# Altium PCB FAT42m2.PcbDoc
Units mm, origin at the board's own origin, x right, y up, seen from the top; angles counter-clockwise.
Board outline 152.4 x 101.6 mm, 2 copper layers (Top Layer, Bottom Layer); 64 components, 142 nets, 215 pads, 78 vias.
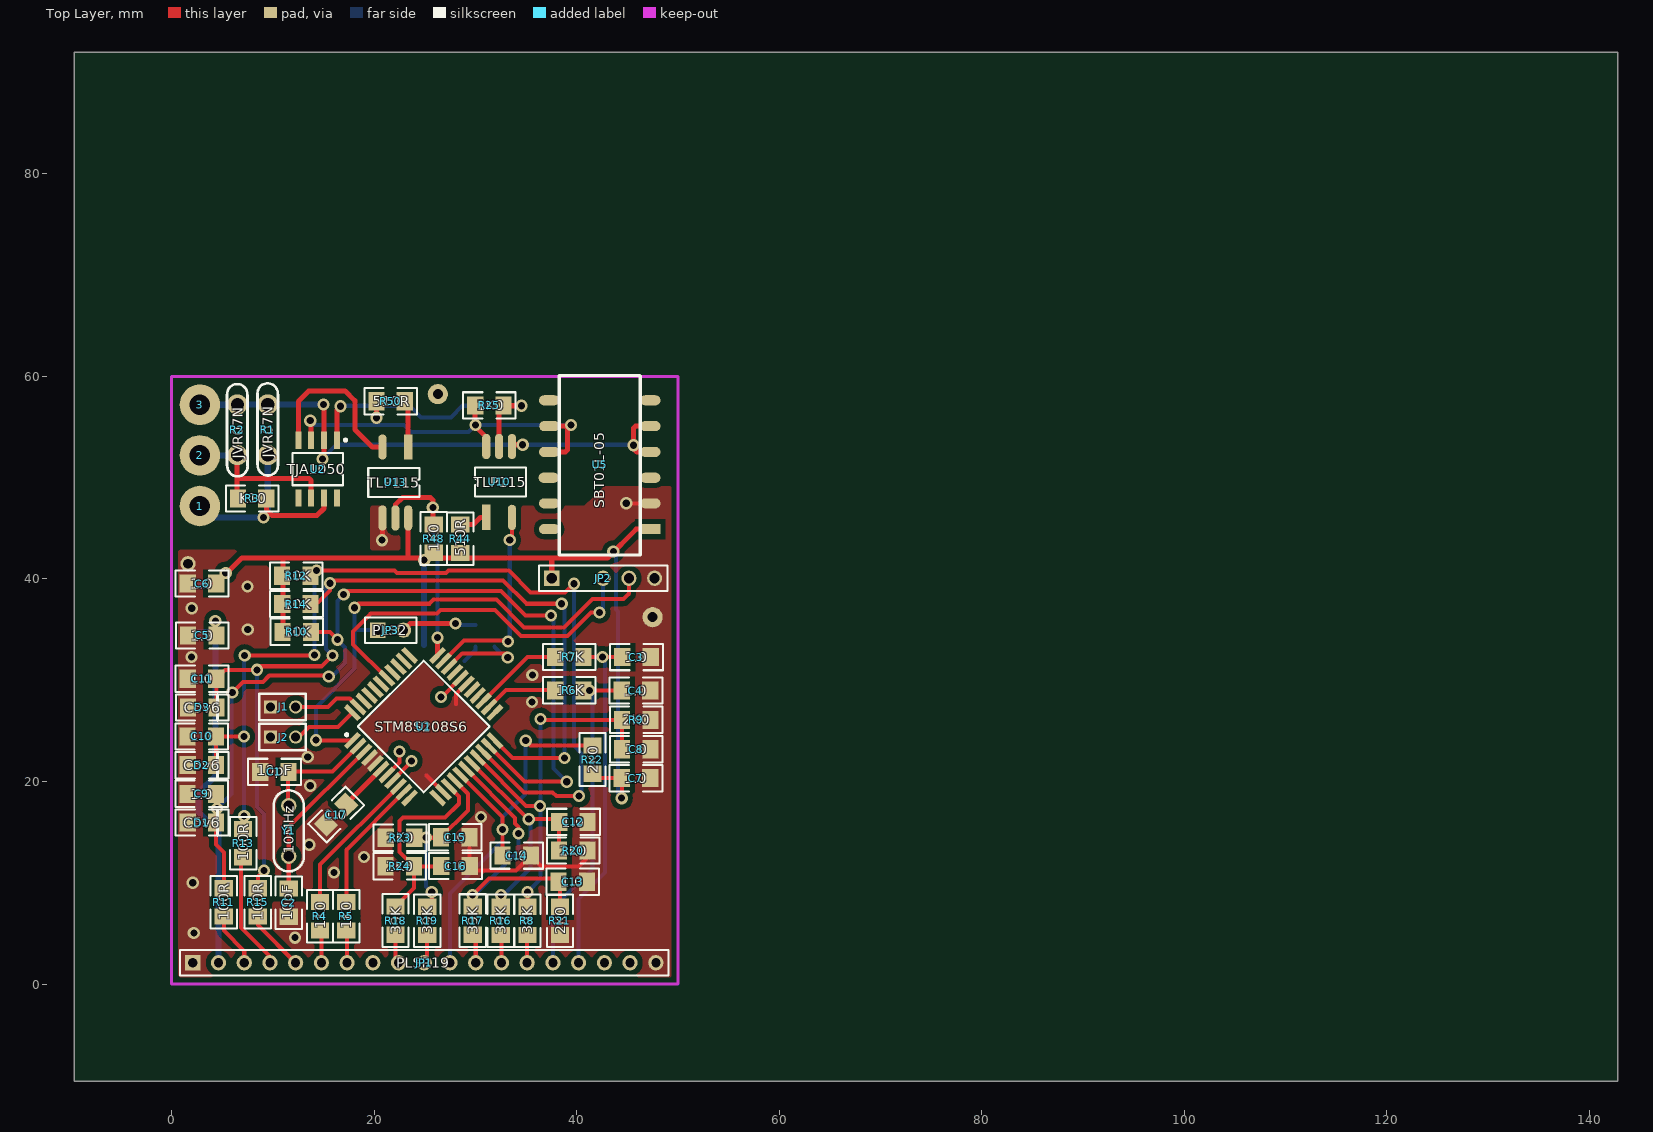
[diagram p0: Top Layer view]
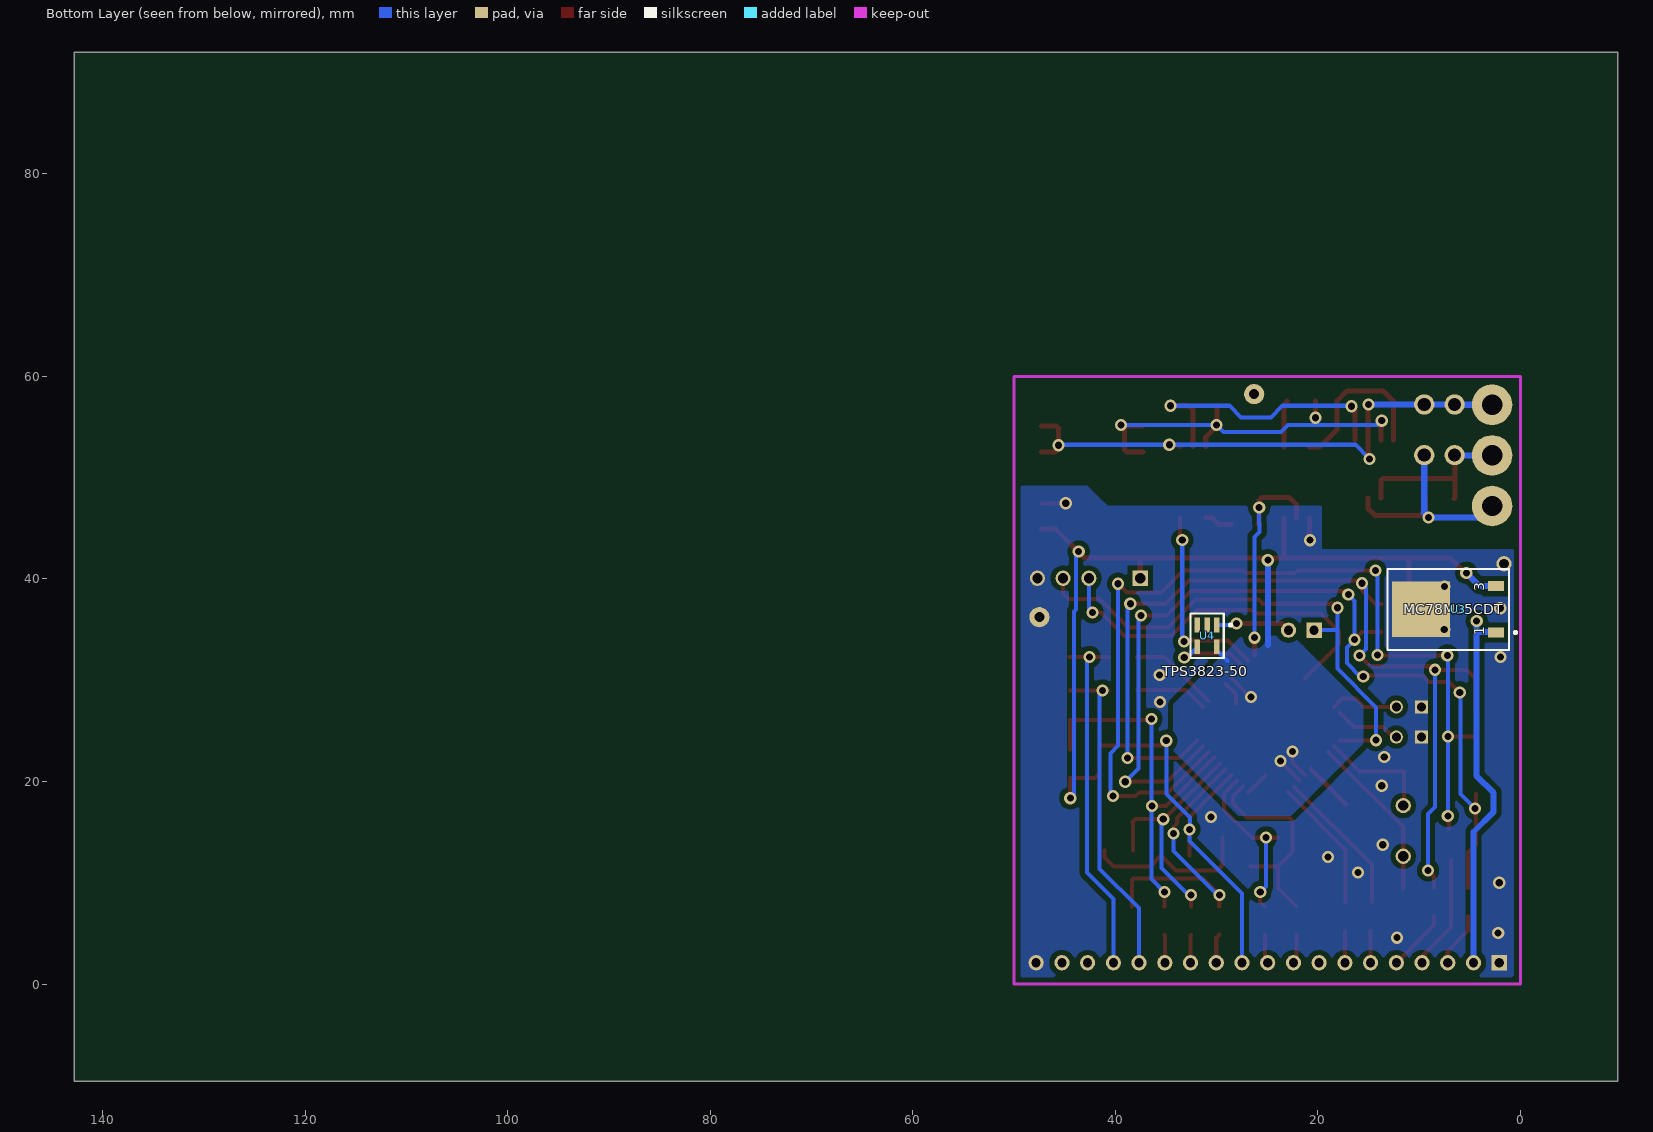
[diagram p1: Bottom Layer view, seen from below]

## Layer stack, top to bottom
Top Layer: signal copper 0.0356
Dielectric: dielectric 0.32, FR-4, Dk 4.8
Bottom Layer: signal copper 0.0356

## Board outline
-9.6,-9.6 142.8,-9.6 142.8,92 -9.6,92

## Design rules (kind name [scope] priority, off if disabled: settings)
Clearance POLY [InPoly] p1: gap=0.5
Clearance mega [InComponent(U1)] p2: gap=0.2
Clearance [All] p3: gap=0.3
ComponentClearance [All] p1: gap=0.01 collisioncheckmode=0
PolygonConnect [All] p1: connectstyle=Direct reliefconductorwidth=0.5 reliefentries=4 polygonreliefangle="90 Angle"
RoutingLayers [All] p1: top layer=Horizontal bottom layer=Vertical
RoutingVias [All] p1: holewidth=0.7 width=1.2 viastyle="Through Hole" minholewidth=0.6 minwidth=1.1 maxholewidth=0.85 maxwidth=1.5
SolderMaskExpansion [All] p1: expansion=0.102
TestPointUsage [All] p1: valid=0 allowmultiple=FALSE
Testpoint [All] p1: side=15 testpointundercomponent=TRUE minsize=1.016 maxsize=2.54 preferedsize=1.524 minholesize=0 maxholesize=1.016 preferedholesize=0.813 testpointgrid=0.025 style=1023 order=1234567890
Width [All] p1: maxlimit=2 minlimit=0.254 preferedwidth=0.254 toplayer_prefwidth=0.4 bottomlayer_prefwidth=0.4 minimp=50.000000 maximp=50.000000 favimp=50.000000
16 further rules are at their usual default settings.

## Components (designator, comment, footprint, x,y, rotation, side; value= is the part's Value field where it differs from the comment)
1 "" PIN2R#1 2.875,46.85 r0 top (schematic designator ?)
2 "" PIN2R#2 2.875,52.05 r0 top (schematic designator ?)
3 "" PIN2R#3 2.7,56.925 r0 top (schematic designator ?)
C1 "10pF" _1206#1 10.175,20.95 r0 top (schematic designator C?)
C2 "10pF" _1206#1 11.575,8.05 r90 top (schematic designator C?)
C3 "1.0" _1206#1 45.9,32.275 r180 top (schematic designator C?)
C4 "1.0" _1206#1 45.85,28.975 r180 top (schematic designator C?)
C5 "1.0" _1206#1 3.05,34.425 r0 top
C6 "1.0" _1206#1 3.025,39.55 r0 top
C7 "1.0" _1206#1 45.85,20.325 r180 top
C8 "1.0" _1206#1 45.875,23.175 r180 top (schematic designator C?)
C9 "1.0" _1206#1 3,18.782 r0 top
C10 "1.0" _1206#1 3,24.452 r0 top
C11 "1.0" _1206#1 3.025,30.147 r0 top
C12 "1.0" _1206#1 39.675,16 r180 top
C13 "1.0" _1206#1 39.6,10.1 r180 top
C14 "1.0" _1206#1 34.075,12.675 r180 top
C15 "1.0" _1206#1 28,14.475 r180 top
C16 "1.0" _1206#2 28.05,11.65 r180 top
C17 "1.0" _1206#2 16.25,16.725 r45 top
D1 "C5v6" _1206d 3,15.935 r180 top
D2 "C5v6" _1206d 3,21.605 r180 top
D3 "C5v6" _1206d 3.025,27.3 r180 top
J1 "" jmp 9.75,27.375 r0 top
J2 "" jmp 9.75,24.4 r0 top
JP1 "PLSR19" HDR1X19 2.1,2.1 r0 top
JP2 "" HDR1X5_uart 37.55,40.075 r0 top
JP3 "PLS2" HDR1X2 20.375,34.925 r0 top
R1 "JVR07N" JVR07N 9.5,52.225 r90 top
R2 "JVR07N" JVR07N 6.5,57.225 r270 top
R3 "K10" _1206#1 7.975,47.95 r0 top
R4 "1K0" _1206#1 14.65,6.7 r90 top (schematic designator R31)
R5 "1K0" _1206#1 17.25,6.7 r90 top (schematic designator R30)
R6 "10K" _1206#1 39.3,29 r0 top (schematic designator R?)
R7 "10K" _1206#1 39.3,32.3 r0 top (schematic designator R?)
R8 "39K" _1206#1 35.15,6.225 r270 top (schematic designator R?)
R9 "2K0" _1206#1 45.875,26.075 r180 top (schematic designator R?)
R10 "10K" _1206#1 12.375,34.775 r0 top
R11 "100R" _1206#1 5.175,8.05 r270 top
R12 "10K" _1206#1 12.325,40.325 r0 top
R13 "100R" _1206#1 7.075,13.9 r270 top
R14 "10K" _1206#1 12.35,37.525 r0 top
R15 "100R" _1206#1 8.525,8.05 r270 top
R16 "39K" _1206#1 32.525,6.225 r270 top
R17 "39K" _1206#1 29.75,6.25 r270 top
R18 "39K" _1206#2 22.125,6.275 r270 top
R19 "39K" _1206#1 25.25,6.225 r270 top
R20 "2K0" _1206#1 39.65,13.175 r180 top
R21 "2K0" _1206#1 38.35,6.25 r90 top
R22 "2K0" _1206#1 41.575,22.15 r270 top
R23 "2K0" _1206#1 22.575,14.45 r0 top
R24 "2K0" _1206#2 22.525,11.625 r0 top
R25 "1K0" _1206#1 31.375,57.125 r180 top (schematic designator R?)
R44 "510R" _1206#1 28.525,43.95 r270 top
R48 "1K0" _1206#1 25.9,43.975 r270 top
R50 "510R" _1206#1 21.65,57.55 r0 top
U1 "STM8S208S6" QFP10X10-G44/G10N 24.9,25.425 r45 top
U2 "TJA1050" SO-G8/D5 14.425,50.85 r180 top
U3 "MC78M05CDT" SIP-G3/Z11.05 6.125,37 r90 bottom
U4 "TPS3823-50" SO-G5/P.95 30.95,34.375 r0 bottom
U5 "SBT01L-05" SBT01DET01 47.293,44.907 r90 top
U10 "TLP115" tlp115 31.075,46.075 r90 top
U13 "TLP115" tlp115 23.375,53.025 r270 top
Y1 "10MHz" QWARZ1 11.575,17.625 r270 top

## Footprints (in the part's own frame and the unit in brackets; to place one, negate y for a bottom-side part, rotate by r counter-clockwise, add the part's x,y. Pads: shape width x height; smd on the part's side, far side on the other; paste and mask are expansions set on the pad)
_1206#1 [mm]
  rect 1.6x1.8 smd: 1(-1.412,-0.007) 2(1.388,-0.007)
  silkscreen extent -2.61,-1.31 2.59,1.29
_1206#2 [mm]
  rect 1.6x1.8 smd: 1(-1.393,-0.003) 2(1.407,-0.003)
  silkscreen extent -2.59,-1.3 2.61,1.3
_1206d [mm]
  rect 1.6x1.8 smd: 1(1.395,-0.009) 2(-1.405,-0.009)
  silkscreen extent -2.6,-1.31 2.6,1.29
HDR1X2 [mm]
  rect 1.5x1.5 hole 0.9: 1(-0.005,0.012)
  round 1.5 hole 0.9: 2(2.535,0.012)
  silkscreen extent -1.28,-1.26 3.8,1.28
HDR1X5_uart [mm]
  rect 1.5x1.5 hole 1: 1(-0.008,-0.009)
  round 1.5 hole 1: 3(5.072,-0.009) 4(7.612,-0.009) 5(10.152,-0.009)
  silkscreen extent -1.28,-1.28 11.42,1.26
HDR1X19 [mm]
  rect 1.5x1.5 hole 0.9: 1(0,0)
  round 1.5 hole 0.9: 2(2.54,0) 3(5.08,0) 4(7.62,0) 5(10.16,0) 6(12.7,0) 7(15.24,0) 8(17.78,0) 9(20.32,0) 10(22.86,0) 11(25.4,0) 12(27.94,0) 13(30.48,0) 14(33.02,0) 15(35.56,0) 16(38.1,0) 17(40.64,0) 18(43.18,0) 19(45.72,0)
  silkscreen extent -1.27,-1.27 46.99,1.27
jmp [mm]
  rect 1.3x1.3 hole 0.9: 1(0.008,-0.012)
  round 1.3 hole 0.9: 2(2.508,-0.012)
  silkscreen extent -1.09,-1.31 3.51,1.29
JVR07N [mm]
  round 2 hole 1.3: 1(0,0) 2(5,0)
  silkscreen extent -2.01,-1.02 7.09,1.02
PIN2R#1 [mm]
  round 4 hole 2: 1(-0.075,0.35)
PIN2R#2 [mm]
  round 4 hole 2: 1(-0.075,0.15)
PIN2R#3 [mm]
  round 4 hole 2: 1(0.1,0.275)
QFP10X10-G44/G10N [mm]
  rect 1.9x0.5 smd: 1(-5.95,4) 2(-5.95,3.2) 3(-5.95,2.4) 4(-5.95,1.6) 5(-5.95,0.8) 6(-5.95,0) 7(-5.95,-0.8) 8(-5.95,-1.6) 9(-5.95,-2.4) 10(-5.95,-3.2) 11(-5.95,-4) 23(5.95,-4) 24(5.95,-3.2) 25(5.95,-2.4) 26(5.95,-1.6) 27(5.95,-0.8) 28(5.95,0) 29(5.95,0.8) 30(5.95,1.6) 31(5.95,2.4) 32(5.95,3.2) 33(5.95,4)
  rect 0.5x1.9 smd: 12(-4,-5.95) 13(-3.2,-5.95) 14(-2.4,-5.95) 15(-1.6,-5.95) 16(-0.8,-5.95) 17(0,-5.95) 18(0.8,-5.95) 19(1.6,-5.95) 20(2.4,-5.95) 21(3.2,-5.95) 22(4,-5.95) 34(4,5.95) 35(3.2,5.95) 36(2.4,5.95) 37(1.6,5.95) 38(0.8,5.95) 39(0,5.95) 40(-0.8,5.95) 41(-1.6,5.95) 42(-2.4,5.95) 43(-3.2,5.95) 44(-4,5.95)
  silkscreen extent -6.07,-4.6 4.6,4.92
QWARZ1 [mm]
  round 1.5 hole 1: 1(0.008,0) 2(5.008,0)
  silkscreen extent -1.49,-1.5 6.51,1.5
SBT01DET01 [mm]
  rect 1x2 smd: 1(0.007,0.007)
  oval 1x2 smd: 2(2.557,0.007) 3(5.082,0.007) 4(7.632,0.007) 4(10.182,0.007) 5(7.632,10.007) 5(10.182,9.982) 6(5.082,10.057) 7(2.557,10.007) 8(0.007,10.007) 10(12.732,0.007) 11(12.732,10.007)
  silkscreen extent -2.54,1.01 15.16,9.01
SIP-G3/Z11.05 [mm]
  rect 1x1.6 smd: 1(-2.285,-3.7) 3(2.285,-3.7)
  rect 5.5x5.7 smd: 4(0,3.7)
  silkscreen extent -4,-5.75 4,7.03
SO-G5/P.95 [mm]
  rect 0.55x1.45 smd: 1(-0.95,-1.075) 2(0,-1.075) 3(0.95,-1.075) 4(0.95,1.075) 5(-0.95,1.075)
  silkscreen extent -2.42,-2.2 1.65,2.2
SO-G8/D5 [mm]
  rect 0.6x1.7 smd: 1(-1.905,-2.85) 2(-0.635,-2.85) 3(0.635,-2.85) 4(1.905,-2.85) 5(1.905,2.85) 6(0.635,2.85) 7(-0.635,2.85) 8(-1.905,2.85)
  silkscreen extent -2.88,-2.97 2.5,1.6
tlp115 [mm]
  rect 2.5x0.8 smd: 1(0.001,-0.004)
  oval 2.5x0.8 smd: 3(0.001,-2.544) 4(7.001,-2.544) 5(7.001,-1.274) 6(7.001,-0.004)
  silkscreen extent 2.09,-3.95 4.92,1.13

## Part data
1 2 3: library part Socket_Ring, "Socket"
C1 C2 C3 C4 C5 C6 C7 C8 C9 C10 C11 C12 C13 C14 C15 C16 C17: library part "Cap Semi", "Capacitor (Semiconductor SIM Model)"
D1 D2 D3: library part Zener, "Default Diode"
J1 J2: library part JMP, "Switch"
JP1: library part "Header 30", "Header, 30-Pin"
JP2: library part SWIM_CONN
JP3: library part "Header 2", "Header, 2-Pin"
R1 R2: library part "Res Varistor", "Varistor (Voltage-Sensitive Resistor)"
R3 R4 R5 R6 R7 R8 R9 R10 R11 R12 R13 R14 R15 R16 R17 R18 R19 R20 R21 R22 R23 R24 R25 R44 R48 R50: library part Res2, "Resistor"
U3: "Three-Terminal Medium Current Positive Voltage Regulator"
U4: library part TPS3823, "Reset IC"
U5: library part SBT01L
Y1: library part XTAL, "Crystal Oscillator"

## Free pads (board coordinates)
  round 1.5 hole 0.95: 0(1.625,41.5)
  round 2 hole 1: 0(26.3,58.25) 1(47.5,36.225)

## Via types
v1: diameter 1.2, hole 0.7, Top Layer to Bottom Layer, 78 vias

## Nets (pads, with @x,y where several pads share a name; then routed paths per layer and width w, separated by ;. In a path a pad name is that pad's centre, name@x,y a point inside that pad or via, vN(x,y) a via of type N, cw(c..) or ccw(c..) an arc to the next point about the centre after c; other vN are vias at no path point)
+5V: C6.2 C7.2 JP2.1 R10.1 R12.1 R14.1 R22.2 R44.2 R48.2 U1.7 U1.8 U1.29 U3.3 U4.5 U5.1 U13.6 | length 110.3
  Top Layer w0.4: U1.7 22.5,21.894 v1(22.5,22.975) ; U1.8 23.7,21.962 v1(23.7,22.025) ; v1(26.6,28.35) 26.694,28.35 U1.29 ; R22.2 41.999,20.332 C7.2 44.462,18.362 v1(44.45,18.35)
  Top Layer w0.5: C6.2 6.944,42.075 43.05,42.075 45.89,44.915 U5.1 ; R10.1 11,34.806 11,42.075 ; 23.35,42.075 23.371,42.096 U13.6 ; v1(24.95,41.85) v1@24.95,42.075 ; 37.525,42.075 37.542,42.058 JP2.1 ; U5.1@47.285,44.907 U5.1@47.293,44.907
  Bottom Layer w0.4: 28.925,31.9 30,32.975 U4.5 ; v1(43.625,42.7) 43.9,42.425 43.9,36.975 44.1,36.775 44.1,18.7 v1(44.45,18.35)
  Bottom Layer w0.6: U3.3 4.035,39.285 v1(5.35,40.6) ; 24.95,33.5 v1(24.95,41.85)
+12V: 
AN0: 
AN1: 
AN2: 
AN3: 
BL0: 
BL1: 
C0: 
C1: 
C2: 
C3: 
C4: 
C5: 
C7: 
C8: 
CS: 
D2: 
D3: 
D4: 
D4: 
D4: 
D5: 
D6: 
D7: 
GND: C1.1 C2.1 C3.1 C4.1 C5.1 C6.1 C7.1 C8.1 C9.1 C10.1 C11.1 C12.1 C13.1 C14.1 C15.1 C16.1 C17.1 D1.1 D2.1 D3.1 J1.1 J2.1 JP1.1 JP1.19 JP2.5 pad.0@1.625,41.5 pad.1 R9.1 R20.1 R21.1 R23.1 R24.1 U1.4 U1.5 U1.13 U1.28 U3.4 U4.2 U5.2 U13.4 | length 26.1
  Top Layer w0.4: 25.175,20.6 26.82,18.955 U1.13 ; 28.1,27.65 28.1,28.625 U1.28 ; C15.1 29.412,11.738 29.95,11.2 34.006,11.2 C14.1 36.544,11.625 40.175,11.625 41.062,12.512 R20.1 ; v1(44.9,47.475) 44.91,47.465 U5.2
  Top Layer w0.5: v1(20.8,43.825) 20.831,43.856 U13.4
  other v1: 12.2,4.575 2.2,5.025 2.1,10 16.05,11 19,12.55 13.6,13.75 30.575,16.5 13.7,19.575 13.45,22.4 35.6,27.85 35.625,30.5 1.975,32.3 7.525,35 2,37.1 7.5,39.25
ID0: JP1.3 R11.2 | length 5.4
  Top Layer w0.4: R11.2 5.168,5.282 7.18,3.27 JP1.3
ID0: 
ID1: JP1.4 R13.2 | length 11.3
  Top Layer w0.4: R13.2@6.85,12.194 6.85,5.6 9.72,2.73 JP1.4
ID2: JP1.5 R15.2 | length 6.1
  Top Layer w0.4: R15.2 8.518,5.807 12.225,2.1 JP1.5
IN0: JP1.14 R8.2 | length 2.7
  Top Layer w0.4: JP1.14 35.12,4.814 R8.2
IN1: JP1.13 R16.2 | length 2.8
  Top Layer w0.4: R16.2 32.58,4.776 JP1.13
IN2: JP1.12 R17.2 | length 2.9
  Top Layer w0.4: R17.2 30.04,4.566 JP1.12
IN3: C14.2 JP1.11 R22.1 U1.16 | length 41.5
  Top Layer w0.4: U1.16 32.687,16.506 C14.2 ; v1(34.975,24.025) 35.438,23.562 R22.1
  Bottom Layer w0.4: JP1.11 27.5,8.925 32.687,14.112 v1(32.687,15.25) 32.63,15.307 32.63,16.43 33.225,17.025 34.975,18.775 v1(34.975,24.025)
IN4: JP1.10 R19.2 | length 2.9
  Top Layer w0.4: JP1.10 25.243,2.383 R19.2
IN5: JP1.9 R18.2 | length 2.9
  Top Layer w0.4: R18.2 22.122,2.398 JP1.9
LED0: JP1.6 R4.1 | length 3.1
  Top Layer w0.4: JP1.6 14.8,5.2 R4.1@14.825,5.225
LED1: JP1.7 R5.1 | length 3.1
  Top Layer w0.4: JP1.7 R5.1@17.34,5.165
MISO: 
MOSI: 
Net1_1: 3.1 R1.2 R2.1 U2.2 U5.4 U10.4 | length 55.7
  Top Layer w0.5: v1(14.9,51.85) 15.06,52.01 15.06,57.165 v1(15,57.225) ; U10.4 33.793,53.25 v1(34.675,53.25) ; U5.4@47.293,52.532 45.968,52.532 45.625,52.875 45.625,54.875 45.832,55.082 U5.4@47.293,55.082
  Bottom Layer w0.4: v1(14.9,51.85) 16.3,53.25 45.575,53.25 v1(45.625,53.2)
  Bottom Layer w0.6: 3.1 6.475,57.2 R2.1 R1.2 14.975,57.225 14.987,57.238 15,57.25 v1(15,57.225)
Net2_1: 2.1 R2.2 R3.1 U2.6 | length 17.1
  Top Layer w0.5: 6.475,49.925 13.575,49.925 13.79,49.71 U2.6 ; R2.2@6.475,52.2 6.475,48.031 R3.1
  Bottom Layer w0.6: 2.1 6.475,52.2 R2.2
Net3_1: 1.1 R1.1 R3.2 U2.7 | length 22.1
  Top Layer w0.5: v1(9.075,46.075) 9.1,46.075 9.525,46.5 ; R3.2 9.363,46.837 9.925,46.275 14.375,46.275 15.06,46.96 U2.7
  Bottom Layer w0.6: 1.1 3.925,46.075 v1(9.075,46.075) 9.5,46.5 R1.1
NetC1_2: 
NetC2_2: 
NetC3_2: C3.2 JP1.16 R7.2 | length 35.4
  Top Layer w0.4: R7.2 44.501,32.293 C3.2
  Bottom Layer w0.4: JP1.16 40.2,8.375 42.825,11 v1@42.825,32.293 ; v1(42.55,32.293) v1@42.75,32.093
NetC3_2: 
NetC4_2: C4.2 JP1.15 R6.2 | length 32.6
  Top Layer w0.4: R6.2 44.451,28.993 C4.2 ; R6.2@41.25,28.993 v1(41.268,28.975)
  Bottom Layer w0.4: JP1.15 37.66,7.485 41.55,11.375 v1@41.55,28.993 ; v1@41.275,28.975 v1(41.268,28.975) v1@41.475,28.768
NetC4_2: 
NetC5_2: C5.2 JP1.2 U3.1 | length 38.3
  Top Layer w0.5: v1(4.325,35.85) 4.325,34.531 C5.2
  Bottom Layer w0.6: U3.1@2.725,34.775 4.225,34.775 ; v1(4.325,35.85) 4.325,34.875 4.225,34.775 ; JP1.2 4.64,15.01 2.65,17 2.65,18.875 4.35,20.575 4.35,34.65 4.225,34.775
NetC17_2: C17.2 U1.6 | length 4.9
  Top Layer w0.5: C17.2 17.247,17.772 U1.6
NetC21_2: 
NetC25_2: 
NetC26_2: 
NetD1_2: 
NetD2_1: 
NetD2_2: 
NetD3_2: 
NetD14_2: 
NetJ1_2: J1.2 U1.43 | length 6.9
  Top Layer w0.4: J1.2 15.438,27.363 16.275,28.2 17.6,28.2 U1.43
NetJ2_2: J2.2 U1.44 | length 6.6
  Top Layer w0.4: J2.2 12.588,24.388 13.575,25.375 16.435,25.375 U1.44
NetJmp1_2: 
NetJmp2_2: 
NetJP1_5: 
NetJP1_6: 
NetJP1_7: 
NetJP1_8: 
NetJP1_15: 
NetJP1_16: 
NetJP1_17: 
NetJP1_17: 
NetJP1_25: 
NetJP1_27: 
NetJP1_28: 
NetJP3_2: JP3.2 U4.1 | length 7.4
  Top Layer w0.5: JP3.2 23.573,35.6 v1(28.05,35.6)
  Bottom Layer w0.4: v1(28.05,35.6) 28.2,35.45 U4.1
NetQ1_1: 
NetQ2_1: 
NetQ2_3: 
NetR14_1: 
NetR15_1: 
NetR24_1: 
NetR25_1: R25.1 U2.1 U10.5 | length 28.4
  Top Layer w0.5: U2.1 16.33,56.68 v1(16.7,57.05) ; U10.5 32.349,56.693 R25.1 32.819,57.1 v1(34.55,57.1)
  Bottom Layer w0.4: v1(16.7,57.05) 16.75,57.1 23.475,57.1 24.65,55.925 27.575,55.925 28.75,57.1 v1(34.55,57.1)
NetR25_2: R25.2 R50.1 U2.3 U5.5 U10.6 | length 41.9
  Top Layer w0.5: v1(13.7,55.625) 13.79,55.535 U2.3 ; v1(20.238,55.913) R50.1 ; v1@29.987,55.175 v1(30.012,55.2) ; R25.2 29.987,55.088 31.079,53.996 U10.6 ; U5.5@37.293,52.532 38.882,52.532 39.1,52.75 39.1,54.875 v1@38.893,55.082 ; U5.5@37.318,55.082 39.332,55.082 v1(39.45,55.2)
  Bottom Layer w0.4: v1(13.7,55.625) 14.125,55.2 22.975,55.2 23.65,54.525 29.337,54.525 v1(30.012,55.2) v1(39.45,55.2) ; 20.175,55.2 20.175,55.85 v1(20.238,55.913)
NetR30_2: 
NetR31_2: 
NetR34_1: 
NetR35_1: 
NetR36_1: 
NetR41_2: 
NetR44_1: R44.1 U10.1 | length 2.9
  Top Layer w0.5: R44.1 29.787,45.362 30.501,46.076 U10.1
NetR50_2: R50.2 U13.1 | length 4.7
  Top Layer w0.5: R50.2 23.371,57.21 U13.1
NetU1_11: 
NetU1_30: 
NetU2_4: U2.4 U13.3 | length 16.5
  Top Layer w0.5: U2.4 12.52,57.52 13.55,58.55 17.15,58.55 18.1,57.6 18.1,54.75 19.826,53.024 U13.3
PA1: C1.2 U1.2 Y1.1 | length 11.4
  Top Layer w0.4: Y1.1 11.493,17.699 11.493,20.962 15.912,20.962 U1.2
PA2: C2.2 U1.3 Y1.2 | length 16.6
  Top Layer w0.4: C2.2 11.575,9.444 11.575,15.494 U1.3
PA4: R4.2 U1.9 | length 14.6
  Top Layer w0.4: R4.2 14.657,11.787 U1.9
PA5: R5.2 U1.10 | length 13.2
  Top Layer w0.4: R5.2 17.257,13.256 U1.10
PB0: C9.2 D1.2 R10.2 R11.1 U1.21 | length 92.4
  Top Layer w0.4: v1@4.388,17.325 v1(4.475,17.325) ; C9.2@4.405,18.758 C9.2 4.388,13.787 5.168,13.007 R11.1 ; v1(6,28.8) 6.025,28.8 7.05,29.825 9.025,29.825 9.65,30.45 15.45,30.45 v1(15.525,30.375) ; R10.2 15.632,34.768 v1(16.4,34) ; v1(17,38.45) 17.375,38.825 32.525,38.825 34.95,36.4 v1(37.475,36.4) ; U1.21 34.875,19.975 v1(39.025,19.975)
  Bottom Layer w0.4: v1(4.475,17.325) 5.925,18.775 5.925,28.475 6,28.55 v1(6,28.8) ; v1(15.525,30.375) 15.825,30.375 17.15,31.7 17.15,33.25 16.375,34.025 16.375,37.825 v1(17,38.45) ; v1(37.475,36.4) 37.7,36.175 37.7,21.3 v1(39.025,19.975)
PB1: C10.2 D2.2 R12.2 R13.1 U1.20 | length 97.6
  Top Layer w0.4: D2.2 4.405,24.428 C10.2 v1(7.145,24.445) ; R13.1 7.068,16.493 v1(7.175,16.6) ; v1(7.225,32.45) 14.075,32.45 v1(14.125,32.5) ; v1(14.325,40.825) 22.025,40.825 22.275,40.575 27.1,40.575 27.35,40.825 33.3,40.825 35.45,38.675 38.875,38.675 v1(39.725,39.525) ; U1.20 34.794,18.925 37.625,18.925 38,18.55 v1(40.25,18.55)
  Bottom Layer w0.4: v1(7.175,16.6) 7.175,32.4 v1(7.225,32.45) ; v1(14.125,32.5) 14.125,40.625 v1(14.325,40.825) ; v1(39.725,39.525) 39.725,23.55 40.5,22.775 40.5,18.8 v1(40.25,18.55)
PB2: C8.2 R8.1 R9.2 U1.19 | length 38.2
  Top Layer w0.4: U1.19 35.013,17.575 v1(36.4,17.575) ; R8.1 35.143,9.068 v1(35.15,9.075) ; v1(36.45,26.175) 36.543,26.082 R9.2 C8.2
  Bottom Layer w0.4: v1(35.15,9.075) 35.175,9.075 36.45,10.35 v1(36.45,26.175)
PB3: C12.2 R16.1 R20.2 U1.18 | length 23.9
  Top Layer w0.4: U1.18 35.181,16.275 38.019,16.275 C12.2 38.262,15.982 R20.2 ; R16.1 32.518,8.793 v1(32.525,8.8)
  Bottom Layer w0.4: v1(32.525,8.8) 32.775,8.8 35.45,11.475 35.45,16.1 v1(35.275,16.275)
PB4: C13.2 R17.1 R21.2 U1.17 | length 29.7
  Top Layer w0.4: U1.17 33.925,16.4 33.925,15.85 34.25,15.525 v1(34.25,14.85) ; R17.1 29.743,8.768 v1(29.725,8.787) 31.363,10.425 38.194,10.425 38.262,10.357 38.357,10.262 R21.2
  Bottom Layer w0.4: v1(29.725,8.787) 29.912,8.787 34.25,13.125 v1(34.25,14.85)
PB6: C15.2 R19.1 R23.2 U1.15 | length 17.2
  Top Layer w0.4: R23.2 26.574,14.443 29.275,17.144 29.275,18.787 U1.15 ; v1@25.125,14.443 v1(25.125,14.475) ; R19.1 25.7,8.094 v1(25.7,9.075)
  Bottom Layer w0.4: v1(25.125,14.475) 25.125,9.65 v1(25.7,9.075)
PB7: C16.2 R18.1 R24.2 U1.14 | length 21.2
  Top Layer w0.4: R18.1 23.932,9.478 R24.2 ; C16.2 26.613,11.622 R24.2 ; U1.14 28.4,18.531 28.4,17.8 27.025,16.425 22.85,16.425 22.525,16.1 22.525,13.029 R24.2
PC1: R6.1 U1.24 | length 7.1
  Top Layer w0.4: U1.24 33.026,29.025 R6.1@37.825,29.025
PC2: R7.1 U1.25 | length 8.9
  Top Layer w0.4: U1.25 35.163,32.293 R7.1
PC3: U1.26
PC5: U1.27
PC7: U1.31 U4.4 | length 8.1
  Top Layer w0.4: U1.31 28.706,32.625 33.125,32.625 v1@33.25,32.5
  Bottom Layer w0.4: U4.4 32.7,32.5 v1@33.25,32.5
  other v1: 33.2,32.25
PD1: JP2.3 U1.38 | length 36.8
  Top Layer w0.4: U1.38 17.925,33.531 17.925,34.825 19.675,36.575 26.2,36.575 26.575,36.95 31.925,36.95 34.5,34.375 39.1,34.375 41.425,36.7 v1(42.25,36.7)
  Bottom Layer w0.4: v1(42.25,36.7) 42.622,37.072 JP2.3
PE6: C11.2 D3.2 R14.2 R15.1 U1.22 | length 95
  Top Layer w0.4: D3.2 4.43,30.123 C11.2 5.273,31 v1@8.425,31 ; v1(8.45,31.025) 8.8,31.375 14.825,31.375 v1(15.9,32.45) ; R15.1 8.518,10.618 v1(9.125,11.225) ; R14.2 14.293,37.518 15.65,38.875 v1(15.65,39.575) 15.925,39.85 32.75,39.85 35.05,37.55 v1(38.525,37.55) ; U1.22 33.682,22.3 v1(38.8,22.3)
  Bottom Layer w0.4: v1(8.45,31.025) 8.425,31 8.425,17.475 9.125,16.775 v1(9.125,11.225) ; v1(15.65,39.575) 15.25,39.175 15.25,33.1 v1(15.9,32.45) ; v1(38.525,37.55) 38.8,37.275 v1(38.8,22.3)
PG0: U1.32 U10.3 | length 19.7
  Top Layer w0.4: U1.32 28.875,33.925 33.125,33.925 v1(33.225,33.825) ; v1(33.4,43.85) 33.619,44.069 U10.3
  Bottom Layer w0.4: v1(33.225,33.825) 33.4,34 v1(33.4,43.85)
PG1: R48.1 U1.33 U13.5 | length 22.6
  Top Layer w0.5: U13.5 22.101,47.326 22.825,48.05 25.55,48.05 25.8,47.8 25.8,45.481 R48.1 ; U1.33 v1(26.279,34.196)
  Bottom Layer w0.4: 25.75,45.45 25.75,44.65 26.279,44.121 v1(26.279,34.196) ; 25.8,45.5 v1(25.8,47.05)
PWMI: 
PWMU: 
PWMU: 
PWMU: 
RES: 
RST: JP2.4 JP3.1 U1.1 | length 52
  Top Layer w0.4: v1(14.25,24.075) 14.279,24.046 U1.1 ; v1(18.075,37.15) 18.475,37.55 25.475,37.55 25.875,37.95 32.1,37.95 34.825,35.225 38.775,35.225 41.55,38 44.625,38 45.162,38.537 JP2.4
  Bottom Layer w0.4: v1(14.25,24.075) 14.25,27.325 18.075,31.15 v1(18.075,37.15) ; 18.137,34.937 JP3.1
RX: 
RX: 
RX: 
RX: 
RX: 
RX: 
RXD: 
RXD: 
SCK: 
TX: 
TX: 
TX: 
TX: 
TX: 
TX: 
TX: 
TX: 
TX: 
TX: 
TX: 
TX: 
TXS: 
pads on no net: JP1.8 JP1.17 JP1.18 U1.11 U1.12 U1.23 U1.30 U1.34 U1.35 U1.36 U1.37 U1.39 U1.40 U1.41 U1.42 U2.5 U2.8 U4.3 U5.3 U5.6 U5.7 U5.8 U5.10 U5.11

## Polygon pours and split planes (outlines as drawn)
GND on Top Layer (hatched 90Degree grid 0.1 track 0.3, remove dead copper): -1.2,42.775 19.75,42.775 19.75,47.075 40.775,47.075 42.725,49.025 50.825,49.025 50.825,-0.5 -1.85,-0.5 -1.85,42.775
GND on Bottom Layer (hatched 90Degree grid 0.1 track 0.3, remove dead copper): -1.4,42.575 -1.4,42.8 19.75,42.8 19.75,47.1 40.825,47.1 42.8,49.075 50.65,49.075 50.65,-0.975 -2.525,-0.975 -2.525,42.8 -1.15,42.8 -1.15,42.775
+5V on Bottom Layer (hatched 90Degree grid 0.1 track 0.3, remove dead copper): 14.7,26.45 22.525,34.275 27.45,34.275 34.15,27.575 34.15,23.075 27.8,16.725 22.675,16.725 15.675,23.725 15.675,27.375 15.65,27.375

## Keep-outs
Keep-Out Layer:
  lines w0.3: 0,0 0,60 50,60 50,0 0,0

## Silkscreen, mask and mechanical layers (free items; w line width, h text height)
Mechanical 1:
  text "GND" at 2.375,-7.275 h1 r90
  text "GND" at 48.525,-7.35 h1 r90
  text "pwm1" at 40.7,-7.825 h1 r90
  text "canl" at 45.55,-7.825 h1 r90
  text "led1" at 18.175,-7.875 h1 r90
  text "adr1" at 10.4,-7.975 h1 r90
  text "led0" at 15.625,-8.15 h1 r90
  text "adr2" at 12.925,-8.25 h1 r90
  text "adr0" at 7.975,-8.3 h1 r90
  text "pwm0" at 38.175,-8.35 h1 r90
  text "canh" at 43.3,-8.35 h1 r90
  text "+12v" at 5.225,-8.575 h1 r90
  text "anin1" at 33.15,-9 h1 r90
  text "anin4" at 25.725,-9.45 h1 r90
  text "anin5" at 23.225,-9.5 h1 r90
  text "anin3" at 28.3,-9.5 h1 r90
  text "anin0" at 35.75,-9.5 h1 r90
  text "anin2" at 30.625,-9.55 h1 r90

## Dimensions
0,60 to 50,60 on Mechanical 1
0,0 to 0,60 on Mechanical 1
2.1,2.1 to 26.3,58.25 on Mechanical 1
26.3,58.25 to 2.1,2.1 on Mechanical 1
47.82,2.1 to 47.5,36.225 on Mechanical 1
2.1,2.1 to 47.5,36.225 on Mechanical 1

## Text inside footprints (layer, text, board x,y; h text height)
U3: Bottom Overlay "3" at 3.6,38.788 h1 r270; Bottom Overlay "1" at 3.6,34.46 h1 r270